# Altium PCB INVERTER_v35_BOTTOM_final[1].PcbDoc
Units mm, origin at the board's own origin, x right, y up, seen from the top; angles counter-clockwise.
Board outline 187.98 x 120.77 mm, 4 copper layers (Top Layer, Mid-Layer 1, Mid-Layer 2, Bottom Layer); 103 components, 34 nets, 286 pads, 113 vias.
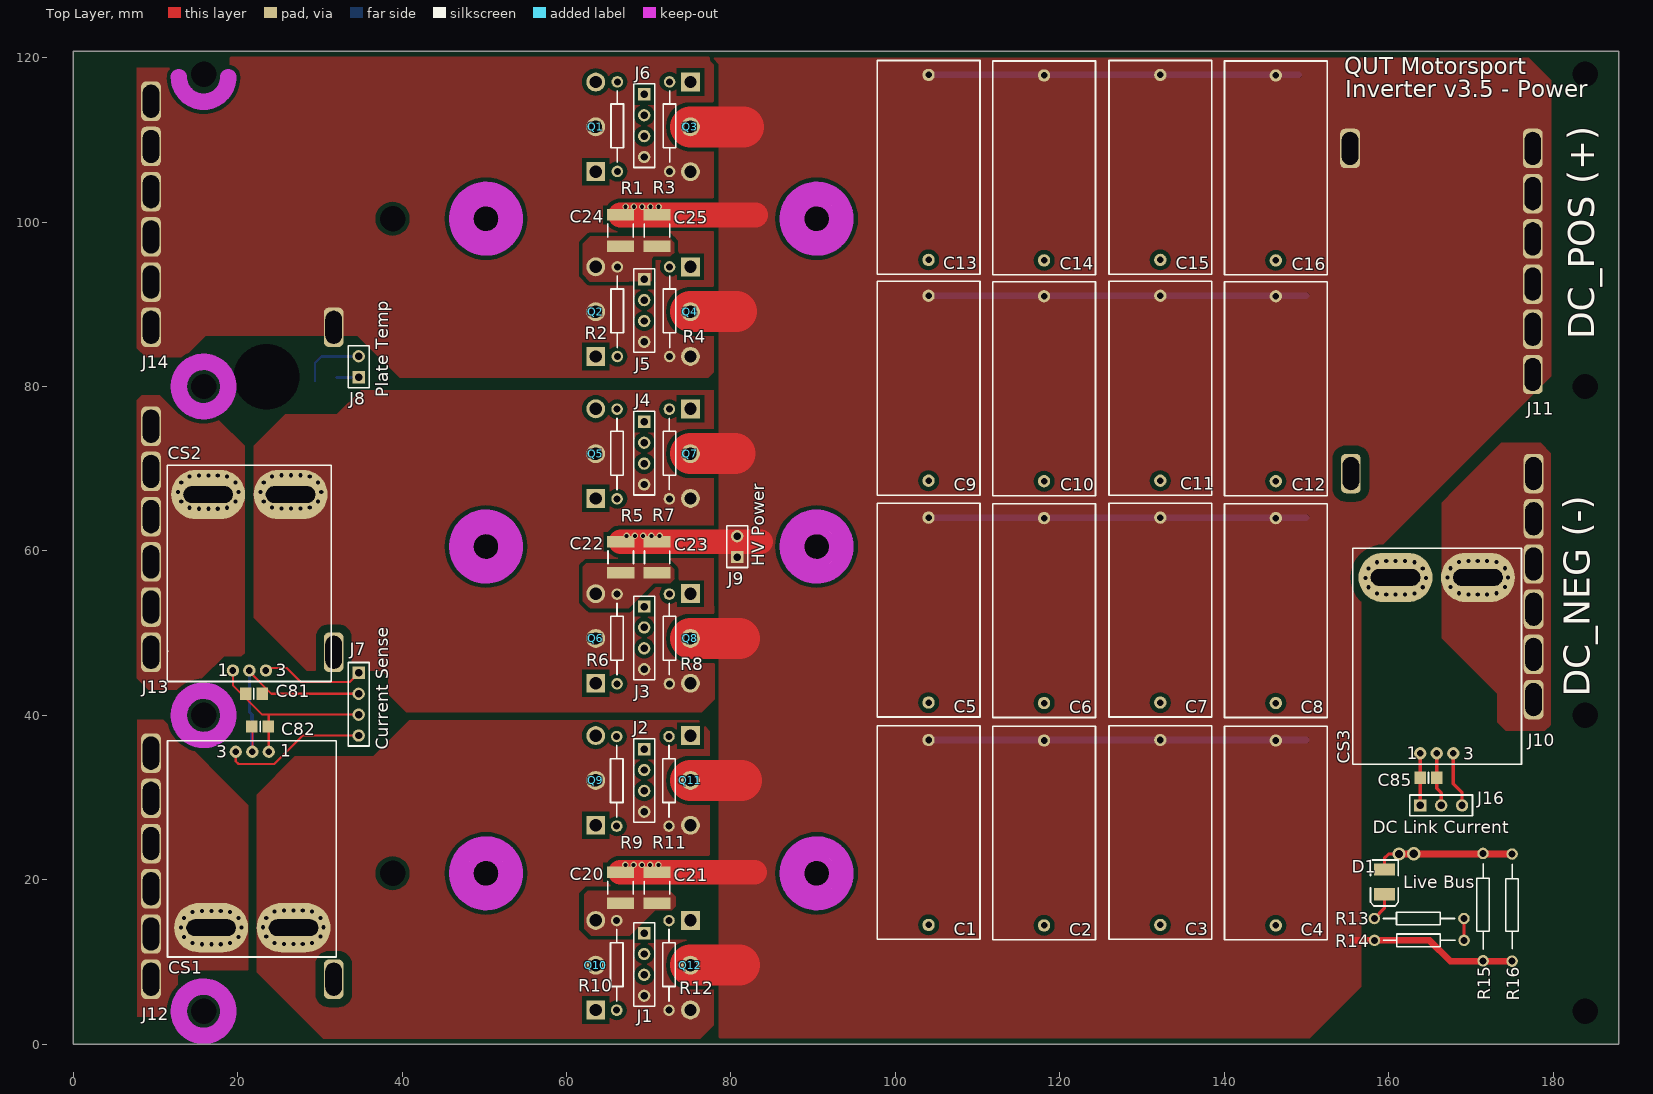
[diagram p0: Top Layer view]
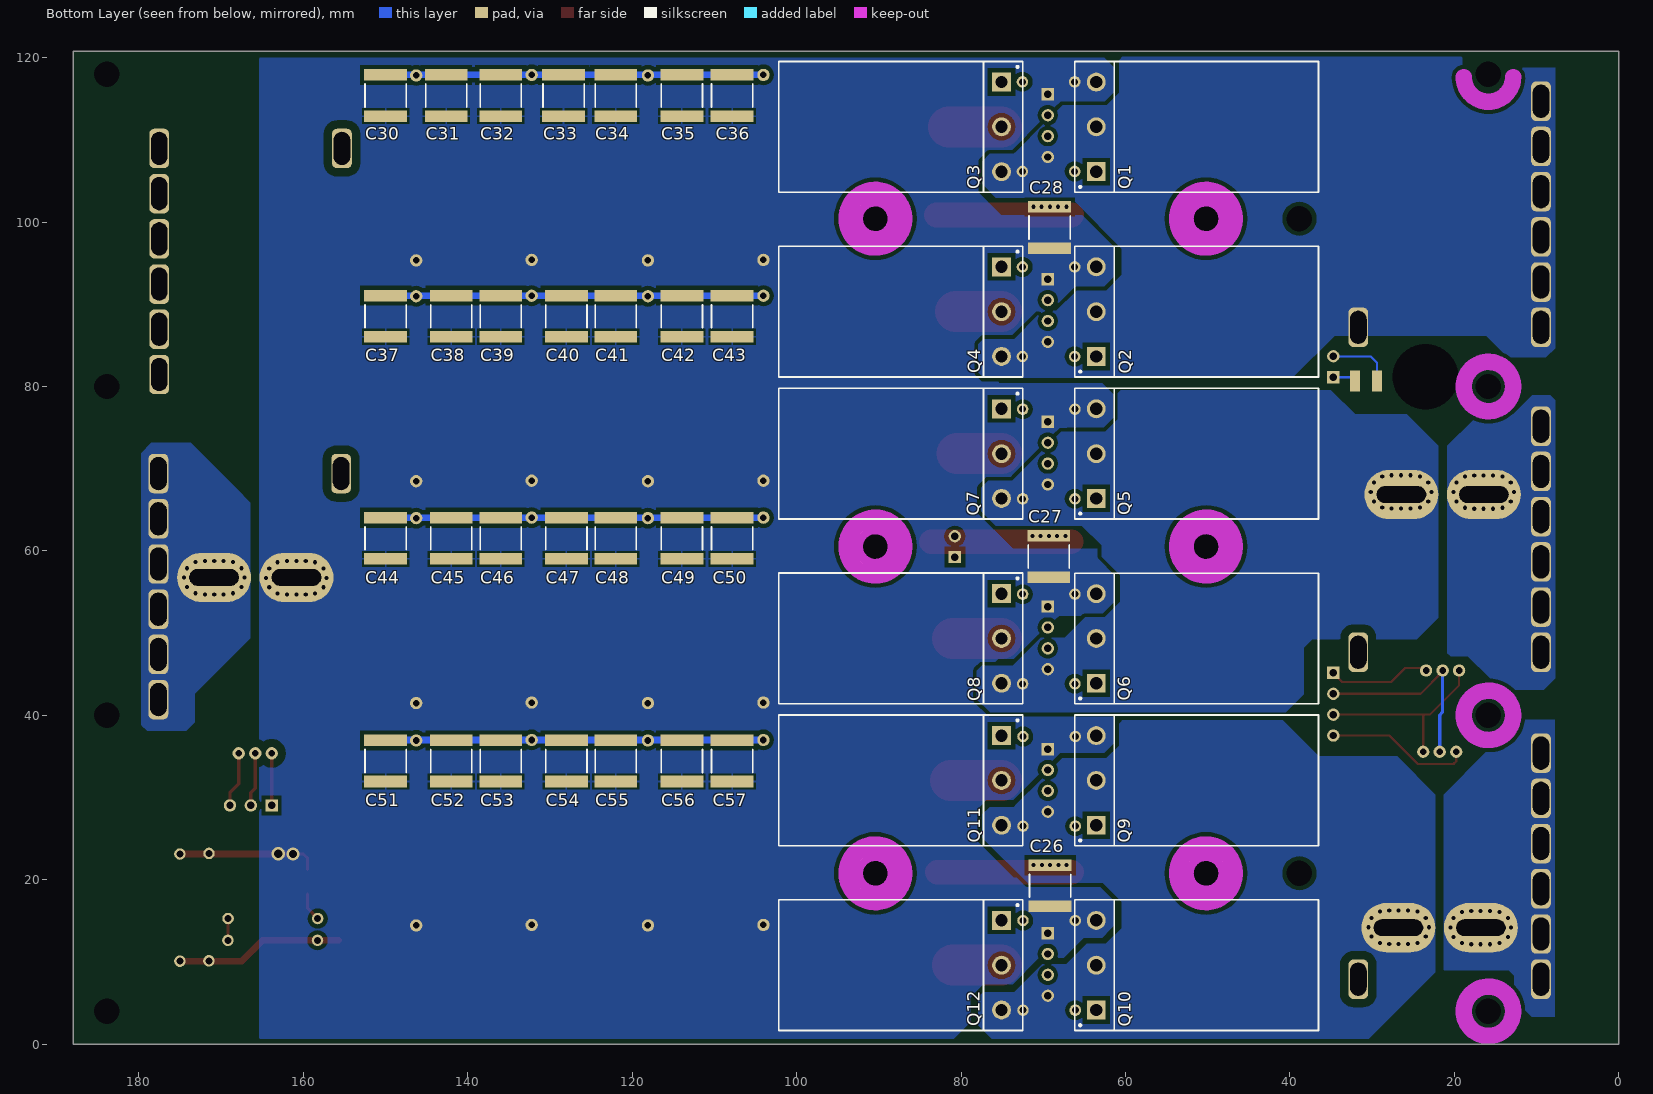
[diagram p1: Bottom Layer view, seen from below]
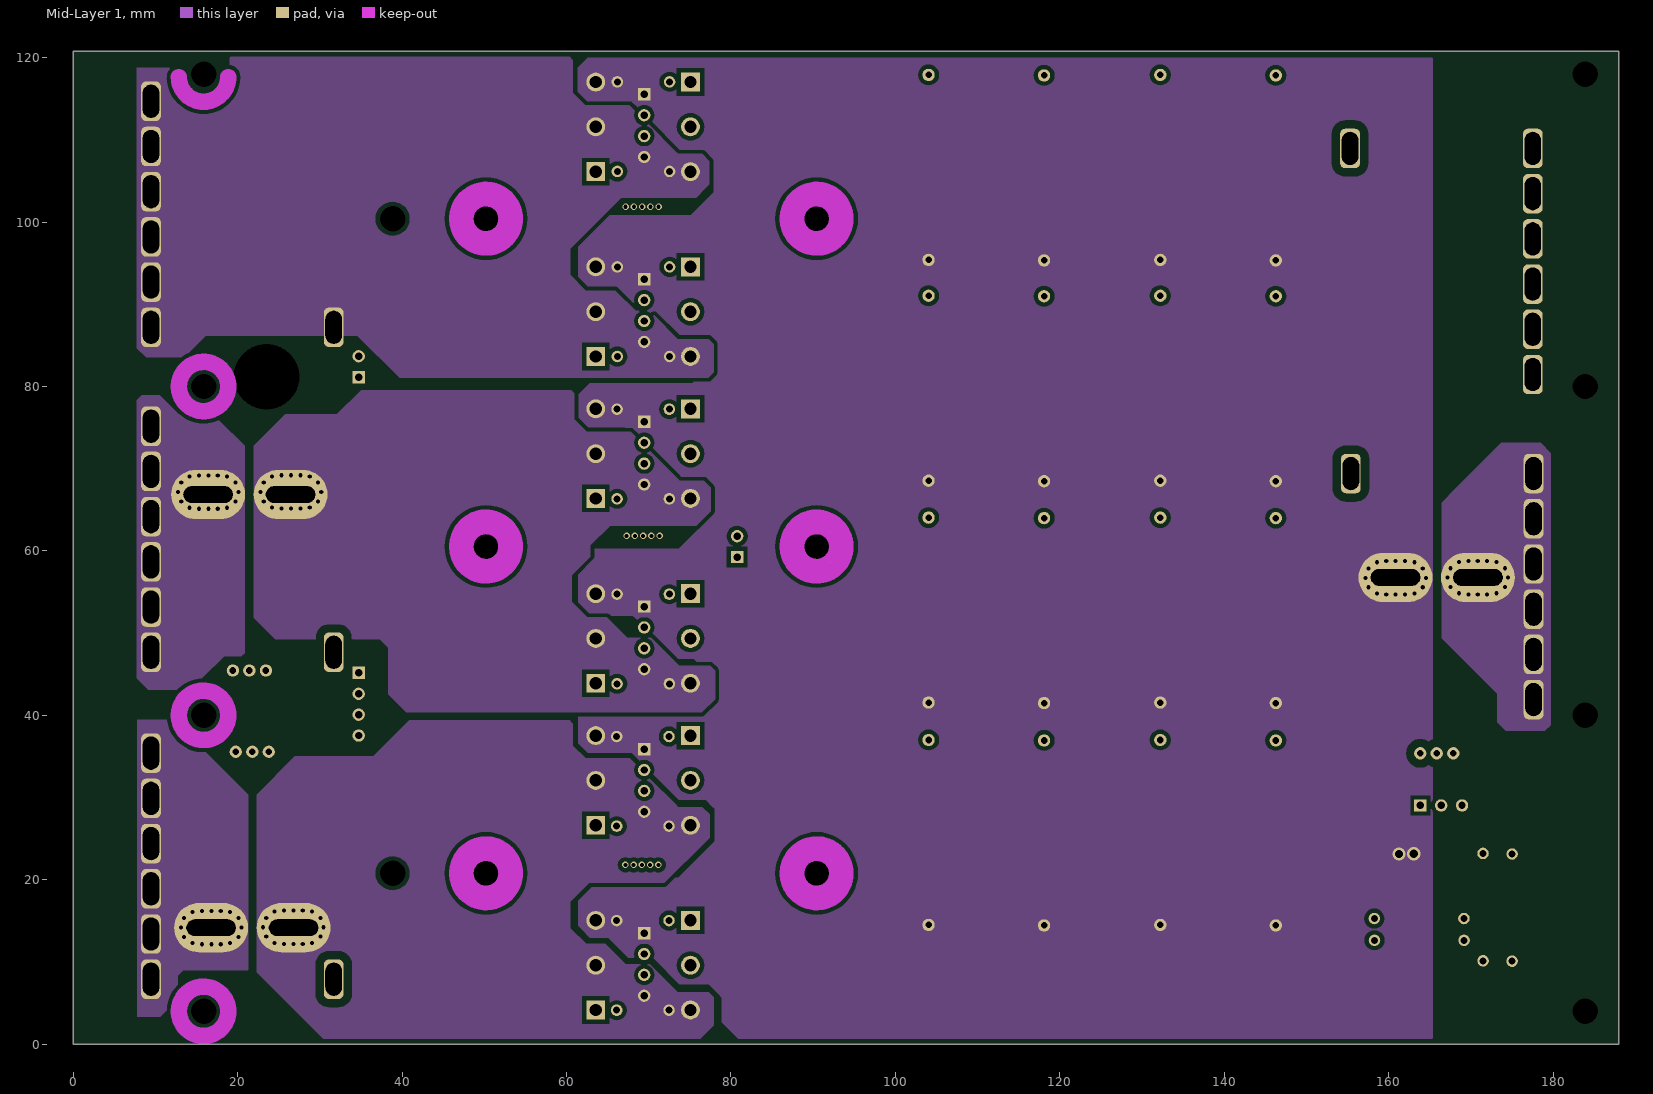
[diagram p2: Mid-Layer 1]
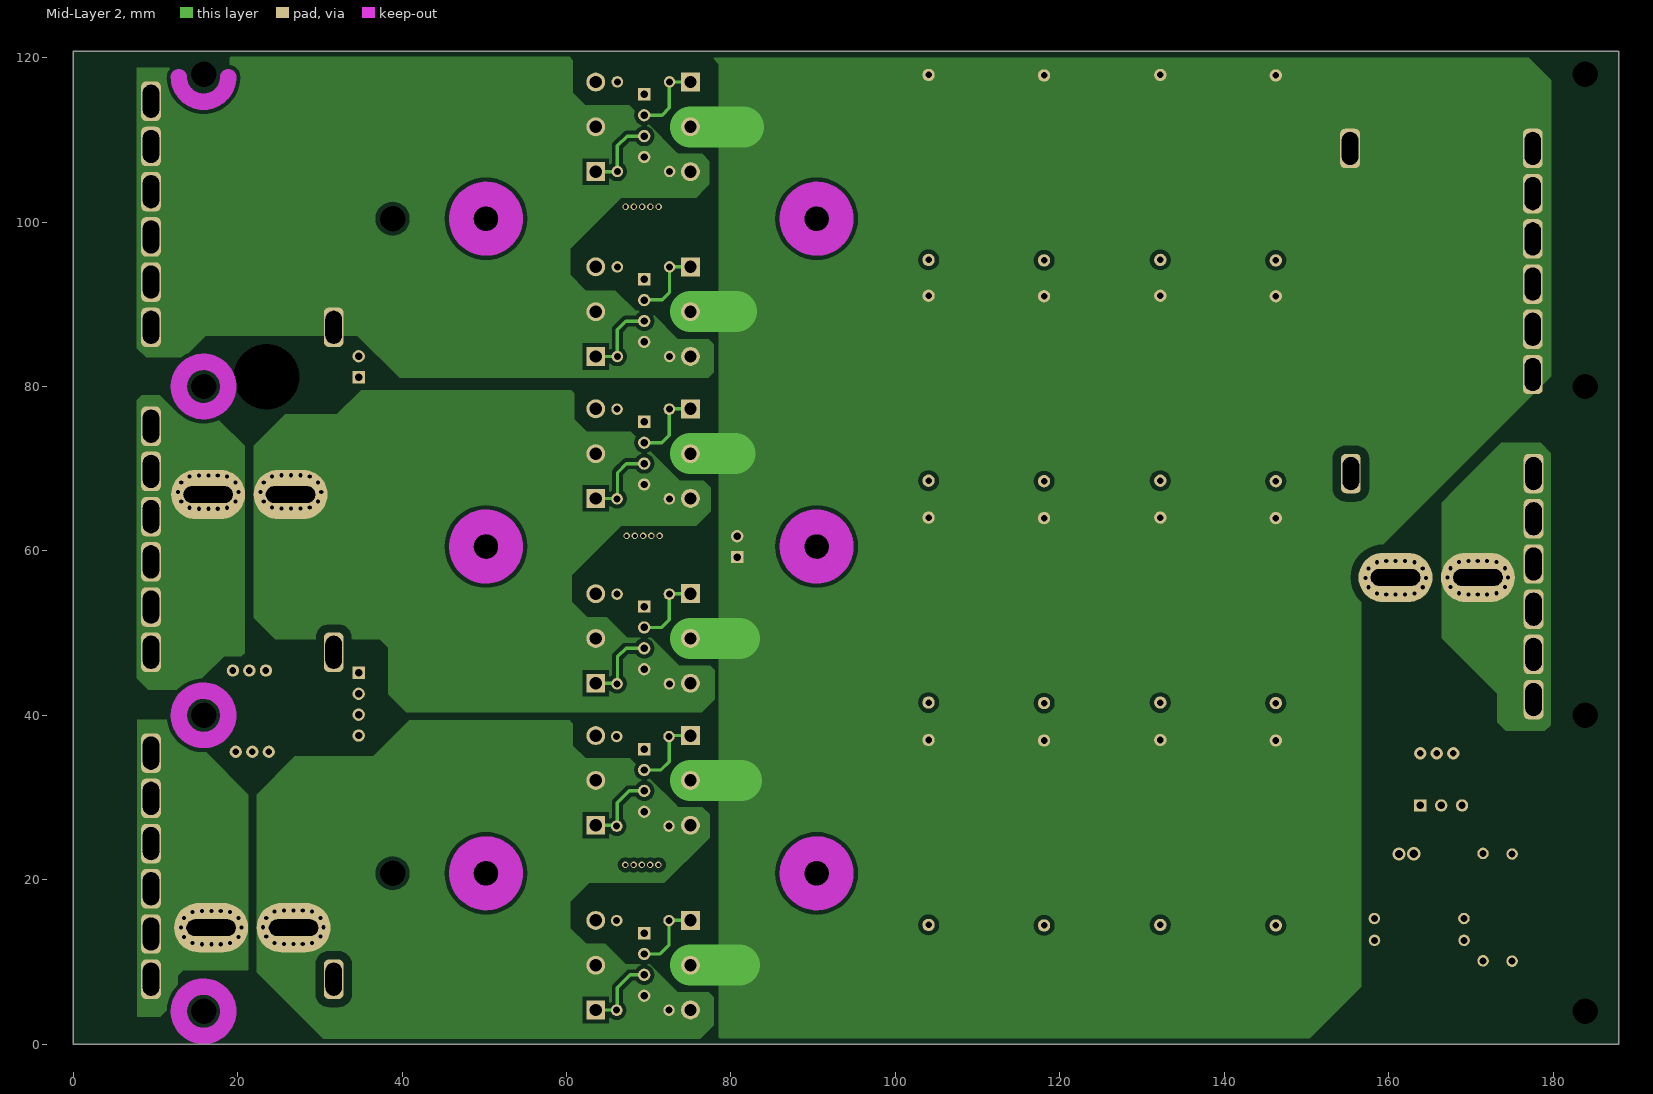
[diagram p3: Mid-Layer 2]

## Layer stack, top to bottom
Top Solder: solder mask 0.0102, Solder Resist, Dk 3.5
Top Layer: signal copper 0.07
Dielectric1: core 0.32, FR-4, Dk 4.8
Mid-Layer 1: signal copper 0.035
Dielectric2: prepreg 0.32, FR-4, Dk 4.8
Mid-Layer 2: signal copper 0.035
Dielectric3: core 0.32, FR-4, Dk 4.8
Bottom Layer: signal copper 0.07
Bottom Solder: solder mask 0.0102, Solder Resist, Dk 3.5

## Board outline
0,0 187.98,0 187.98,120.77 0,120.77

## Design rules (kind name [scope] priority, off if disabled: settings)
Clearance "Shrimp Clear" [InComponent('J10')OR InComponent('J11') OR InComponent('J12') OR InComponent('J13') OR InComponent('J15') OR InComponent('CS3')] p1: gap=1
Clearance [All] p2: gap=0.5
Height [All] p1: minheight=0 maxheight=30 prefheight=12.7
HoleSize [All] p1: absolutevalues=TRUE maxlimit=10 minlimit=0.025 maxpercent=80.000 minpercent=20.000
MinimumSolderMaskSliver [All] p1: minsoldermaskwidth=0.16
PlaneClearance [All] p1: clearance=1
PlaneConnect [All] p1: planeconnectstyle=Direct reliefexpansion=0.508 reliefentries=4 reliefconductorwidth=0.254 reliefairgap=0.254
PolygonConnect "Rear Cap Connect" [(InNet('HV_NEG') AND (InComponent('C30') OR InComponent('C31') OR InComponent('C32') OR InComponent('C33') OR InComponent('C34') OR InComponent('C35') OR InComponent('C36') OR InComponent('C37') OR InComponent('C38') OR InComponent('C39') OR InComponent('C40') OR InComponent('C41') OR InComponent('C42') OR InComponent('C43') OR InComponent('C44') OR InComponent('C45') OR InComponent('C46') OR InComponent('C47') OR InComponent('C48') OR InComponent('C49') OR InComponent('C50') OR InComponent('C51') OR InComponent('C52') OR InComponent('C53') OR InComponent('C54') OR InComponent('C55') OR InComponent('C56') OR InComponent('C57')))] p1: connectstyle=Relief reliefconductorwidth=0.254 reliefentries=4 polygonreliefangle="90 Angle" airgapwidth=0.254
PolygonConnect [All] p2: connectstyle=Direct reliefconductorwidth=0.254 reliefentries=4 polygonreliefangle="90 Angle" airgapwidth=0.254
RoutingVias [All] p1: holewidth=0.5 width=0.8 viastyle="Through Hole" minholewidth=0.5 minwidth=0.8 maxholewidth=0.5 maxwidth=0.8
SilkToSolderMaskClearance SilkscreenOverComponentPads [IsPad] p1: minsilkscreentomaskgap=0.254 clearancetoexposedcopper=TRUE
SolderMaskExpansion [IsVia] p1: expansion=-1
Width [All] p1: maxlimit=10 minlimit=0.2 preferedwidth=0.254
24 further rules are at their usual default settings.

## Components (designator, comment, footprint, x,y, rotation, side; value= is the part's Value field where it differs from the comment)
C1 "Comment" RAD-0.1 104.035,35.731 r90 top locked
C2 "Comment" RAD-0.1 118.085,35.671 r90 top locked
C3 "Comment" RAD-0.1 132.225,35.731 r90 top locked
C4 "Comment" RAD-0.1 146.275,35.671 r90 top locked
C5 "Comment" RAD-0.1 104.035,62.781 r90 top locked
C6 "Comment" RAD-0.1 118.085,62.721 r90 top locked
C7 "Comment" RAD-0.1 132.225,62.781 r90 top locked
C8 "Comment" RAD-0.1 146.275,62.721 r90 top locked
C9 "Comment" RAD-0.1 104.035,89.771 r90 top locked
C10 "Comment" RAD-0.1 118.085,89.711 r90 top locked
C11 "Comment" RAD-0.1 132.225,89.771 r90 top locked
C12 "Comment" RAD-0.1 146.275,89.711 r90 top locked
C13 "Comment" RAD-0.1 104.035,116.631 r90 top locked
C14 "Comment" RAD-0.1 118.085,116.571 r90 top locked
C15 "Comment" RAD-0.1 132.225,116.631 r90 top locked
C16 "Comment" RAD-0.1 146.275,116.571 r90 top locked
C20 "Comment" 1812 66.56,19.02 r270 top
C21 "Comment" 1812 70.99,19.02 r270 top
C22 "Comment" 1812 66.59,59.22 r270 top
C23 "Comment" 1812 71.02,59.22 r270 top
C24 "Comment" 1812 66.56,98.97 r270 top
C25 "Comment" 1812 70.99,98.97 r270 top
C26 "Comment" 2220 69.16,19.25 r270 bottom
C27 "Comment" 2220 69.33,59.32 r270 bottom
C28 "Comment" 2220 69.23,99.34 r270 bottom
C30 "Comment" 2220 150,115.4 r270 bottom
C31 "Comment" 2220 142.61,115.4 r270 bottom
C32 "Comment" 2220 136,115.4 r270 bottom
C33 "Comment" 2220 128.35,115.4 r270 bottom
C34 "Comment" 2220 122,115.4 r270 bottom
C35 "Comment" 2220 113.95,115.4 r270 bottom
C36 "Comment" 2220 107.85,115.4 r270 bottom
C37 "Comment" 2220 150,88.56 r270 bottom
C38 "Comment" 2220 142,88.56 r270 bottom
C39 "Comment" 2220 136,88.56 r270 bottom
C40 "Comment" 2220 128,88.56 r270 bottom
C41 "Comment" 2220 122,88.56 r270 bottom
C42 "Comment" 2220 113.95,88.56 r270 bottom
C43 "Comment" 2220 107.85,88.56 r270 bottom
C44 "Comment" 2220 150,61.53 r270 bottom
C45 "Comment" 2220 142,61.53 r270 bottom
C46 "Comment" 2220 136,61.53 r270 bottom
C47 "Comment" 2220 128,61.53 r270 bottom
C48 "Comment" 2220 122,61.53 r270 bottom
C49 "Comment" 2220 113.95,61.53 r270 bottom
C50 "Comment" 2220 107.85,61.53 r270 bottom
C51 "Comment" 2220 150,34.45 r270 bottom
C52 "Comment" 2220 142,34.45 r270 bottom
C53 "Comment" 2220 136,34.45 r270 bottom
C54 "Comment" 2220 128,34.45 r270 bottom
C55 "Comment" 2220 122,34.45 r270 bottom
C56 "Comment" 2220 113.95,34.45 r270 bottom
C57 "Comment" 2220 107.85,34.45 r270 bottom
C81 "Comment" 6-0805_M 21.95,42.62 r180 top
C82 "Comment" 6-0805_M 22.73,38.64 r180 top
C85 "Comment" 6-0805_M 164.85,32.41 r0 top
CS1 "Comment" T05B 33.9,12.26 r180 top
CS2 "Comment" T05B 9.28,68.76 r0 top
CS3 "Comment" T05B 153.72,58.68 r0 top
D1 "Comment" 3.5X2.8X1.9 159.49,19.75 r270 top
J1 "Comment" HDR1X4 69.44,13.51 r270 top
J2 "Comment" HDR1X4 69.44,35.89 r270 top
J3 "Comment" HDR1X4 69.44,53.23 r270 top
J4 "Comment" HDR1X4 69.44,75.7 r270 top
J5 "Comment" HDR1X4 69.44,93.05 r270 top
J6 "Comment" HDR1X4 69.44,115.54 r270 top
J7 "Comment" HDR1X4 34.71,45.16 r270 top
J8 "Comment" HDR1X2 34.71,81.14 r90 top
J9 "Comment" HDR1X2 80.75,59.25 r90 top
J10 "Comment" Shrimp44 166.52,55.66 r180 top
J11 "Comment" Shrimp44 166.42,95.21 r180 top
J12 "Comment" Shrimp44 20.56,21.65 r0 top
J13 "Comment" Shrimp44 20.56,61.42 r0 top
J14 "Comment" Shrimp44 20.56,100.95 r0 top
J16 "Comment" HDR1X3 163.85,29.04 r0 top
Q1 "Comment" TO-247 63.546,111.585 r90 top locked
Q2 "Comment" TO-247 63.546,89.105 r90 top locked
Q3 "Comment" TO-247 75.071,111.585 r270 top locked
Q4 "Comment" TO-247 75.071,89.106 r270 top locked
Q5 "Comment" TO-247 63.546,71.834 r90 top locked
Q6 "Comment" TO-247 63.546,49.354 r90 top
Q7 "Comment" TO-247 75.071,71.834 r270 top locked
Q8 "Comment" TO-247 75.071,49.355 r270 top locked
Q9 "Comment" TO-247 63.546,32.083 r90 top
Q10 "Comment" TO-247 63.546,9.603 r90 top
Q11 "Comment" TO-247 75.071,32.083 r270 top locked
Q12 "Comment" TO-247 75.071,9.604 r270 top locked
R1 "Comment" AXIAL-0.3#1 66.17,110.03 r270 top
R2 "Comment" AXIAL-0.3#1 66.17,87.52 r270 top
R3 "Comment" AXIAL-0.3#1 72.53,110.03 r270 top
R4 "Comment" AXIAL-0.3#1 72.53,87.52 r270 top
R5 "Comment" AXIAL-0.3#1 66.14,70.21 r270 top
R6 "Comment" AXIAL-0.3#1 66.14,47.71 r270 top
R7 "Comment" AXIAL-0.3#1 72.5,70.21 r270 top
R8 "Comment" AXIAL-0.3#1 72.5,47.71 r270 top
R9 "Comment" AXIAL-0.3#1 66.1,30.39 r270 top
R10 "Comment" AXIAL-0.3#1 66.1,8 r270 top
R11 "Comment" AXIAL-0.3#1 72.46,30.39 r270 top
R12 "Comment" AXIAL-0.3#1 72.46,8 r270 top
R13 "Comment" AXIAL-0.3#1 165.29,15.28 r0 top
R14 "Comment" AXIAL-0.3#1 165.31,12.63 r0 top
R15 "Comment" AXIAL-0.3#2 171.49,19.17 r90 top
R16 "Comment" AXIAL-0.3#3 175.02,19.12 r90 top

## Footprints (in the part's own frame and the unit in brackets; to place one, negate y for a bottom-side part, rotate by r counter-clockwise, add the part's x,y. Pads: shape width x height; smd on the part's side, far side on the other; paste and mask are expansions set on the pad)
3.5X2.8X1.9 [mm] "SM LED; 2 C-Bend Leads; Body 3.5 x 2.8 x 1.9 mm, inc leads (LxWxH typ)"
  rect 1.5x2.6 smd: 1(-1.5,0) 2(1.5,0)
  silkscreen extent -2.65,-1.7 2.95,1.7
6-0805_M [mm] "Chip Resistor, Body 2.0x1.2mm, IPC Low Density"
  rect 1.4x1.5 smd: 1(-1,0) 2(1,0)
  silkscreen extent 0,-0.65 0,0.65, body extent -1.07,-0.7 1.07,0.7, height 0.7
1812 [mm] "Chip Capacitor, Body 4.5x3.2mm, IPC High Density"
  rect 1.4x3.3 smd: 1(-1.9,0) 2(1.9,0)
  silkscreen extent -0.8,-1.55 0.8,1.55, body extent -2.4,-1.7 2.4,1.7, height 1.4
2220 [mm] "Chip Capacitor, Body 5.7x5.0mm, IPC High Density"
  rect 1.4x5.2 smd: 1(-2.5,0) 2(2.5,0)
  silkscreen extent -1.4,-2.5 1.4,2.5, body extent -2.95,-2.63 2.95,2.63, height 1.4
AXIAL-0.3#1 [mm] "Axial Device, Thru-Hole; 2 Leads; 0.3 in Pin Spacing"
  round 1.4 hole 0.85: 1(-7.03,0) 2(3.87,0)
  silkscreen extent -5.94,-0.76 2.77,0.76
AXIAL-0.3#2 [mm] "Axial Device, Thru-Hole; 2 Leads; 0.3 in Pin Spacing"
  round 1.4 hole 0.85: 1(-9.03,0) 2(4.03,0.01)
  silkscreen extent -7.61,-0.76 2.77,0.76
AXIAL-0.3#3 [mm] "Axial Device, Thru-Hole; 2 Leads; 0.3 in Pin Spacing"
  round 1.4 hole 0.85: 1(-9.03,0) 2(4.01,0)
  silkscreen extent -7.49,-0.76 2.77,0.76
HDR1X2 [mm] "Connector; Header; 2 Position"
  rect 1.5x1.5 hole 0.9: 1(0,0)
  round 1.5 hole 0.9: 2(2.54,0)
  silkscreen extent -1.27,-1.27 3.81,1.27
HDR1X3 [mm] "Connector; Header; 3 Position"
  rect 1.5x1.5 hole 0.9: 1(0,0)
  round 1.5 hole 0.9: 2(2.54,0) 3(5.08,0)
  silkscreen extent -1.27,-1.27 6.35,1.27
HDR1X4 [mm] "Connector; Header; 4 Position"
  rect 1.5x1.5 hole 0.9: 1(0,0)
  round 1.5 hole 0.9: 2(2.54,0) 3(5.08,0) 4(7.62,0)
  silkscreen extent -1.27,-1.27 8.89,1.27
RAD-0.1 [mm] "Radial Cap, Thru-Hole; 2 Leads; 0.1 in Pin Spacing"
  round 1.5 hole 0.8: 1(-21.23,0) 2(1.27,0)
  silkscreen extent -22.98,-6.25 3.02,6.25
Shrimp44 [mm]
  rrect50% 2.4x4.8 hole 2 slot 4 at 90 deg: 1(-11.112,13.75) 2(-11.112,8.25) 3(-11.112,2.75) 4(-11.112,-2.75) 5(-11.112,-8.25) 6(-11.112,-13.75) 7(11.113,-13.75)
T05B [mm] "TO, Thru-Hole, Vertical, Heatsink Mounted; 5 Bent Staggered Leads; Pitch 1.7 mm"
  round 1.5 hole 0.8: 1(10.128,-23.305) 3(12.129,-23.305) 5(14.145,-23.305)
  oval 9x6 hole 2 slot 6 at 0 deg: 4(7.112,-1.905) 5(17.145,-1.905)
  silkscreen extent 1.92,-24.65 22.44,1.65
TO-247 [mm] "SIP with Mounting Hole; 3 Leads; Body 20 x 15.6 x 5 mm (typ); Pitch 5.45 mm"
  rect 2.3x2.3 hole 1.5: 1(-5.45,0)
  round 2.3 hole 1.5: 2(0,0) 3(5.45,0)
  body extent -7.95,4.72 7.95,26.27

## Part data
C20 C21 C22 C23 C24 C25 C26 C27 C28 C30 C31 C32 C33 C34 C35 C36 C37 C38 C39 C40 C41 C42 C43 C44 C45 C46 C47 C48 C49 C50 C51 C52 C53 C54 C55 C56 C57: library part "Cap Pol3"
D1: library part LED3
J1 J2 J3 J4 J5 J6 J7: library part "Header 4"
J8 J9: library part "Header 2"
J10 J11 J12 J13 J14: library part Shrimp44
J16: library part "Header 3"
R1 R2 R3 R4 R5 R6 R7 R8 R9 R10 R11 R12 R13 R14 R15 R16: library part Res1

## Free pads (board coordinates)
  rect 1.2x2.5 smd far side: 2(32.09,80.67) 3(29.39,80.67)
  round 1.524 hole 3.1: ""(15.84,4) ""(15.84,40) ""(15.84,80) ""(15.84,118) ""(38.83,20.78) ""(38.83,100.409) ""(183.91,4) ""(183.91,40) ""(183.91,80) ""(183.91,118)
  round 1.524 hole 8: ""(23.51,81.19)
  round 5 hole 5 unplated: ""(50.195,20.78) ""(50.195,60.531) ""(50.195,100.409) ""(90.422,20.653) ""(90.422,60.404) ""(90.422,100.282)

## Via types
v1: diameter 0.8, hole 0.5, Top Layer to Bottom Layer, 111 vias
v2: diameter 1.6, hole 1, Top Layer to Bottom Layer, 2 vias

## Nets (pads, with @x,y where several pads share a name; then routed paths per layer and width w, separated by ;. In a path a pad name is that pad's centre, name@x,y a point inside that pad or via, vN(x,y) a via of type N, cw(c..) or ccw(c..) an arc to the next point about the centre after c; other vN are vias at no path point)
gate_U_HI_A: J6.2 Q3.1 R3.1 | length 9.2
  Mid-Layer 2 w0.4: J6.2 71.61,113 72.5,113.89 72.5,117.04 72.495,117.035 Q3.1
gate_U_HI_B: J5.2 Q4.1 R4.1 | length 9.1
  Mid-Layer 2 w0.4: J5.2@69.44,90.562 71.642,90.562 72.51,91.43 72.51,94.54 72.526,94.556 Q4.1
gate_U_LO_A: J6.3 Q1.1 R1.2 | length 10
  Mid-Layer 2 w0.4: Q1.1 66.315,106.135 66.18,106 66.18,109.27 67.37,110.46 J6.3
gate_U_LO_B: J5.3 Q2.1 R2.2 | length 9.7
  Mid-Layer 2 w0.4: Q2.1 66.205,83.655 66.17,83.62 66.17,86.9 67.22,87.95 J5.3@69.44,87.95
gate_V_HI_A: J4.2 Q7.1 R7.1 | length 9.2
  Mid-Layer 2 w0.4: J4.2 71.56,73.16 72.48,74.08 72.48,77.18 72.584,77.284 Q7.1
gate_V_HI_B: J3.2 Q8.1 R8.1 | length 9.7
  Mid-Layer 2 w0.4: J3.2 71.58,50.69 72.49,51.6 72.49,54.96 72.335,54.805 Q8.1
gate_V_LO_A: J4.3 Q5.1 R5.2 | length 9.4
  Mid-Layer 2 w0.4: Q5.1 65.974,66.384 66.2,66.61 66.2,69.54 67.28,70.62 J4.3
gate_V_LO_B: J3.3 Q6.1 R6.2 | length 10.9
  Mid-Layer 2 w0.4: Q6.1 66.594,43.904 66.19,43.5 66.19,47.11 67.23,48.15 J3.3
gate_W_HI_A: J2.2 Q11.1 R11.1 | length 9.2
  Mid-Layer 2 w0.4: J2.2 71.48,33.35 72.48,34.35 72.48,37.47 72.543,37.533 Q11.1
gate_W_HI_B: J1.2 Q12.1 R12.1 | length 9
  Mid-Layer 2 w0.4: J1.2 71.37,10.97 72.47,12.07 72.47,14.97 72.554,15.054 Q12.1
gate_W_LO_A: J2.3 Q9.1 R9.2 | length 9.2
  Mid-Layer 2 w0.4: Q9.1 66.173,26.633 66.17,26.63 66.17,29.37 67.61,30.81 J2.3
gate_W_LO_B: J1.3 Q10.1 R10.2 | length 9.2
  Mid-Layer 2 w0.4: Q10.1 R10.2@66.077,4.153 ; R10.2 66.11,4.13 66.17,4.19 66.17,6.87 67.73,8.43 J1.3
HV_NEG: C1.1 C2.1 C3.1 C4.1 C5.1 C6.1 C7.1 C8.1 C9.1 C10.1 C11.1 C12.1 C13.1 C14.1 C15.1 C16.1 C20.2 C21.2 C22.2 C23.2 C24.2 C25.2 C26.2 C27.2 C28.2 C30.2 C31.2 C32.2 C33.2 C34.2 C35.2 C36.2 C37.2 C38.2 C39.2 C40.2 C41.2 C42.2 C43.2 C44.2 C45.2 C46.2 C47.2 C48.2 C49.2 C50.2 C51.2 C52.2 C53.2 C54.2 C55.2 C56.2 C57.2 CS3.4 D1.1 J1.1 J2.1 J3.1 J4.1 J5.1 J6.1 Q1.3 Q2.3 Q5.3 Q6.3 Q9.3 Q10.3 R1.1 R2.1 R5.1 R6.1 R9.1 R10.1 R15.2 R16.2 | length 18.9
  Top Layer w0.4: D1.1 159.49,22.62 160,23.13 163.06,23.13 v2@163.05,23.14
  Top Layer w0.8: v2(161.26,23.13) R16.2
  other v1: 159.71,54.69 160.853,54.69 161.996,54.69 158.567,54.817 163.139,54.817 157.551,55.579 164.155,55.579 157.17,56.722 164.536,56.722 157.551,57.865 164.155,57.865 158.567,58.627 163.139,58.627 159.71,58.754 160.853,58.754 161.996,58.754
  other v2: 163.05,23.16
HV_POS: C1.2 C2.2 C3.2 C4.2 C5.2 C6.2 C7.2 C8.2 C9.2 C10.2 C11.2 C12.2 C13.2 C14.2 C15.2 C16.2 C20.1 C21.1 C22.1 C23.1 C24.1 C25.1 C26.1 C27.1 C28.1 C30.1 C31.1 C32.1 C33.1 C34.1 C35.1 C36.1 C37.1 C38.1 C39.1 C40.1 C41.1 C42.1 C43.1 C44.1 C45.1 C46.1 C47.1 C48.1 C49.1 C50.1 C51.1 C52.1 C53.1 C54.1 C55.1 C56.1 C57.1 J9.1 J9.2 J11.1 J11.2 J11.3 J11.4 J11.5 J11.6 J11.7 Q3.2 Q4.2 Q7.2 Q8.2 Q11.2 Q12.2 R14.1 R15.1 R16.1 | length 324.1
  Top Layer w0.8: 155.69,12.62 164.98,12.62 167.51,10.09 R16.1
  Top Layer w3: C20.1 82.85,20.92 ; C24.1 82.98,100.87 ; C22.1 83.63,61.12
  Top Layer w5: Q12.2 81.006,9.604 ; Q11.2 81.277,32.083 ; Q8.2 81.045,49.355 ; Q7.2 80.464,71.834 ; Q4.2 80.686,89.106 ; Q3.2 81.495,111.585
  Mid-Layer 2 w5: Q12.2 81.006,9.604 ; Q11.2 81.277,32.083 ; Q8.2 81.045,49.355 ; Q7.2 80.464,71.834 ; Q4.2 80.686,89.106 ; Q3.2 81.495,111.585
  Bottom Layer w0.8: C1.2 C51.1@149.949,37.001 ; C5.2 C44.1@149.979,64.051 ; C9.2 C37.1@149.981,91.041 ; C13.2 C30.1@149.06,117.9
  other v1: 67.16,21.81 68.16,21.81 69.16,21.81 70.16,21.81 71.16,21.81 67.31,61.82 68.31,61.82 69.31,61.82 70.31,61.82 71.31,61.82 67.19,101.86 68.19,101.86 69.19,101.86 70.19,101.86 71.19,101.86
HV_SHUNT: CS3.5@170.865,56.775 J10.1 J10.2 J10.3 J10.4 J10.5 J10.6
  other v1: 169.693,54.72 170.836,54.72 171.979,54.72 168.55,54.847 173.122,54.847 167.534,55.609 174.138,55.609 167.153,56.752 174.519,56.752 167.534,57.895 174.138,57.895 168.55,58.657 173.122,58.657 169.693,58.784 170.836,58.784 171.979,58.784
ph_U: J5.4 J6.4 J14.1 J14.2 J14.3 J14.4 J14.5 J14.6 J14.7 Q1.2 Q2.2 Q3.3 Q4.3 R3.2 R4.2
ph_V: CS2.5@26.425,66.855 J3.4 J4.4 Q5.2 Q6.2 Q7.3 Q8.3 R7.2 R8.2
  other v1: 25.324,65.136 26.467,65.136 27.61,65.136 24.181,65.263 28.753,65.263 23.165,66.025 29.769,66.025 22.784,67.168 30.15,67.168 23.165,68.311 29.769,68.311 24.181,69.073 28.753,69.073 25.324,69.2 26.467,69.2 27.61,69.2
ph_V_shunt: CS2.4 J13.1 J13.2 J13.3 J13.4 J13.5 J13.6
  other v1: 15.281,65.126 16.424,65.126 17.567,65.126 14.138,65.253 18.71,65.253 13.122,66.015 19.726,66.015 12.741,67.158 20.107,67.158 13.122,68.301 19.726,68.301 14.138,69.063 18.71,69.063 15.281,69.19 16.424,69.19 17.567,69.19
ph_W: CS1.4 J1.4 J2.4 Q9.2 Q10.2 Q11.3 Q12.3 R11.2 R12.2
  other v1: 25.624,12.186 26.767,12.186 27.91,12.186 24.481,12.313 29.053,12.313 23.465,13.075 30.069,13.075 23.084,14.218 30.45,14.218 23.465,15.361 30.069,15.361 24.481,16.123 29.053,16.123 25.624,16.25 26.767,16.25 27.91,16.25
ph_W_shunt: CS1.5@16.755,14.165 J12.1 J12.2 J12.3 J12.4 J12.5 J12.6
  other v1: 15.641,12.156 16.784,12.156 17.927,12.156 14.498,12.283 19.07,12.283 13.482,13.045 20.086,13.045 13.101,14.188 20.467,14.188 13.482,15.331 20.086,15.331 14.498,16.093 19.07,16.093 15.641,16.22 16.784,16.22 17.927,16.22
retainer: pad.@38.83,20.78
shunt_+5V: C81.2 C82.1 CS1.1 CS2.1 J7.3 | length 23.4
  Top Layer w0.254: CS2.1@19.438,45.755 19.438,43.612 22.97,40.08 J7.3 ; CS1.1 23.772,40.06
shunt_b_5v: C85.1 CS3.1 J16.1 | length 6.3
  Top Layer w0.4: J16.1@163.848,29.042 CS3.1
shunt_b_gnd: C85.2 CS3.3 J16.2 | length 6.6
  Top Layer w0.4: CS3.3 165.848,31.102 166.39,30.56 J16.2
shunt_b_sig: CS3.5@167.865,35.375 J16.3 | length 6.8
  Top Layer w0.4: CS3.5@167.865,35.375 167.865,31.675 168.93,30.61 J16.3
shunt_gnd: C81.1 C82.2 CS1.3 CS2.3 J7.2 | length 28.2
  Top Layer w0.254: CS2.3@21.439,45.755 21.439,45.271 24.09,42.62 J7.2 ; CS1.3 C82.2@21.772,38.598
  Bottom Layer w0.4: CS2.3@21.439,45.755 21.439,40.362 21.772,40.029 CS1.3
shunt_series_V: 
shunt_series_W: 
shunt_sig_V: CS2.5@23.425,45.455 J7.1 | length 12.4
  Top Layer w0.254: CS2.5@23.455,45.755 25.945,45.755 27.64,44.06 33.61,44.06 J7.1
shunt_sig_W: CS1.5@19.755,35.565 J7.4 | length 17.7
  Top Layer w0.254: CS1.5@19.755,35.565 19.755,34.415 20.09,34.08 24.46,34.08 27.92,37.54 J7.4
temp_a: J8.2 pad.3 | length 7.9
  Bottom Layer w0.254: pad.3 29.39,82.87 30.19,83.67 J8.2@34.71,83.67
temp_b: J8.1 pad.2 | length 2.7
  Bottom Layer w0.254: pad.2@32.02,81.13 J8.1@34.71,81.13
temp_gnd: 
temp_sig: 
pads on no net: D1.2 J10.7 J12.7 J13.7 R13.1 R13.2 R14.2
copper on no net: | length 6.1
  Top Layer w0.4: 158.26,15.28 159.49,16.51 159.49,18.25 ; 169.16,12.67 169.16,15.28

## Polygon pours and split planes (outlines as drawn)
HV_SHUNT on Top Layer "Top Layer-No Net 1" (solid, pour order 33): 173.7,73.13 168.125,67.555 166.45,65.88 166.45,49.38 172.04,43.79 173.21,42.62 173.21,40.06 173.21,39.17 174.01,38.37 174.24,38.14 176.89,38.14 179.02,38.14 179.63,38.75 179.73,38.85 179.73,39.9 179.73,71.89 178.49,73.13 178.18,73.13
HV_POS on Top Layer "Top Layer-No Net 1" (solid, pour order 29): 78.52,119.23 78.52,0.72 150.41,0.72 156.65,6.96 156.65,24.58 156.65,58.12 179.77,81.24 179.77,117.27 177.06,119.98 146.72,119.98 77.77,119.98 77.7,120.05
HV_NEG on Top Layer "Top Layer-No Net 1" (solid, pour order 32): 62.12,18.25 62.12,14.06 62.83,13.35 62.99,13.19 67.71,13.19 67.71,13.21 70.5,16 70.77,16.27 72.71,16.27 72.78,16.27 73.29,16.78 73.26,16.81 73.26,17.59 73.26,17.94 72.83,18.37 72.51,18.69 62.76,18.69 62.56,18.69 62.12,18.25
ph_W on Top Layer "Top Layer-No Net 1" (solid, pour order 44): 76.29,0.66 77.9,2.27 77.9,12.7 70.9,12.7 64.23,12.7 62.7,12.7 61.49,13.91 61.49,18.35 62.32,19.18 75.41,19.18 77.39,21.16 77.39,27.2 77.39,27.96 77.39,28.46 77.39,29.32 77.39,34.38 77.39,38.092 76.1,39.382 68.369,39.381 65.21,39.38 59.92,39.38 60.13,39.38 60.27,39.38 60.33,39.38 60.35,39.38 60.38,39.38 40.85,39.38 36.49,35.02 26.96,35.02 22.29,30.35 22.29,8.77 30.41,0.65 34.27,0.65 36.68,0.65 37.87,0.65 38.52,0.65 39.78,0.65 40.74,0.65 76.28,0.65
HV_NEG on Top Layer "Top Layer-No Net 1" (solid, pour order 31): 61.98,58.07 61.98,53.88 62.69,53.17 62.85,53.01 67.57,53.01 67.57,53.03 70.36,55.82 70.63,56.09 72.57,56.09 72.64,56.09 73.15,56.6 73.12,56.63 73.12,57.41 73.12,57.76 72.69,58.19 72.37,58.51 62.62,58.51 62.42,58.51 61.98,58.07
HV_NEG on Top Layer "Top Layer-No Net 1" (solid, pour order 30): 61.96,97.35 61.96,93.63 62.67,92.92 62.83,92.76 67.55,92.76 67.55,92.78 70.34,92.76 70.34,95.57 70.61,95.84 72.55,95.84 72.62,95.84 73.13,96.35 73.1,96.38 73.1,97.16 73.1,97.51 72.67,97.94 72.35,98.26 62.87,98.26
ph_V on Top Layer "Top Layer-No Net 1" (solid, pour order 43): 76.45,40.37 78.06,41.98 78.06,45.41 78.04,45.43 78.06,46.47 78.04,47.65 78.06,49.03 77.929,54.201 77.929,59.42 77.929,62.75 77.929,63.82 77.929,67.81 77.929,73.96 77.929,79.565 63.49,79.565 60.565,79.565 60.08,79.565 58.66,79.565 35.035,79.565 32.07,76.6 25.76,76.6 21.94,72.78 21.94,51.886 24.582,49.244 28.418,45.408 36.33,45.408 37.592,45.408 38.3,44.7 38.3,42.55 40,40.85 40.49,40.36 40.9,40.36 76.44,40.36
ph_U on Top Layer "Top Layer-No Net 1" (solid, pour order 39): 77.24,81.07 77.88,81.73 77.88,85.16 77.88,86.14 77.88,87.23 77.88,90.77 77.88,94.23 77.88,96.27 77.88,98.84 77.88,101.15 77.88,107.02 77.88,108.42 77.88,115.99 77.88,120.099 60.36,120.09 59.8,120.09 27.86,120.09 27.54,120.09 27.3,120.09 26.75,120.09 26.3,120.09 19.03,120.092 19.03,117.68 17.9,115.76 14.98,115.29 12.06,118.75 7.74,118.75 7.74,84.67 8.86,83.55 13.45,83.55 16.085,86.185 34.565,86.185 39.68,81.07 42.66,81.07 61.01,81.07
ph_V_shunt on Top Layer "Top Layer-No Net 1" (solid, pour order 54): 7.74,44.5 9.11,43.13 14.28,43.13 18.335,47.185 20.44,47.185 20.82,47.565 20.82,59.97 20.82,72.78 17,76.6 12.84,76.6 10.525,78.915 10.09,78.915 9.715,78.915 9.11,78.915 8.335,78.915 7.74,78.32
ph_W_shunt on Top Layer "Top Layer-No Net 1" (solid, pour order 53): 7.75,3.33 10.55,3.33 12.715,5.495 12.715,8.295 13.38,8.96 21.3,8.96 21.3,29.082 18.191,32.191 12.046,38.336 10.946,39.436 9.13,39.436 7.75,39.436
HV_SHUNT on Bottom Layer "Top Layer-No Net 1" (solid, pour order 33): 173.7,73.13 168.125,67.555 166.45,65.88 166.45,49.38 172.04,43.79 173.21,42.62 173.21,40.06 173.21,39.17 174.01,38.37 174.24,38.14 176.89,38.14 179.02,38.14 179.63,38.75 179.73,38.85 179.73,39.9 179.73,71.89 178.49,73.13 178.18,73.13
ph_V on Bottom Layer "Top Layer-No Net 1" (solid, pour order 42): 76.45,40.37 78.06,41.98 78.06,45.41 78.04,45.43 77.45,46.02 77.42,46.02 73.71,46.02 70.29,49.44 67.36,49.44 64.89,51.91 62.53,51.91 60.62,53.82 60.62,54.04 60.62,57.03 62.909,59.319 62.909,60.674 65.29,63.056 75.766,63.056 77.55,64.84 77.55,66.91 77.55,67.67 76.9,68.32 76.68,68.54 75.43,68.54 73.76,68.54 73.35,68.95 67.83,74.47 64.7,74.47 62.48,74.47 60.94,76.01 60.94,77.93 60.94,78.23 60.94,79.19 60.565,79.565 60.08,79.565 58.66,79.565 35.035,79.565 32.07,76.6 25.76,76.6 21.94,72.78 21.94,51.886 24.582,49.244 34.174,49.244 35.35,49.244 37.254,49.244 37.859,48.639 38.3,48.197 38.3,42.55 40,40.85 40.49,40.36 40.9,40.36 76.44,40.36
ph_U on Bottom Layer "Top Layer-No Net 1" (solid, pour order 38): 77.24,81.07 77.88,81.73 77.88,85.16 77.86,85.18 77.27,85.77 77.24,85.77 73.53,85.77 70.11,89.19 68.39,89.19 65.92,91.66 62.35,91.66 60.44,93.57 60.44,93.79 60.44,96.78 66.63,102.97 75.75,102.97 76.88,104.1 77.37,104.59 77.37,106.66 77.37,107.42 76.72,108.07 76.5,108.29 75.25,108.29 73.58,108.29 73.17,108.7 67.65,114.22 64.52,114.22 62.3,114.22 60.76,115.76 60.76,117.68 60.76,117.98 60.76,119.69 60.68,119.77 60.36,120.09 59.8,120.09 27.86,120.09 27.54,120.09 27.3,120.09 26.75,120.09 26.3,120.09 19.03,120.092 19.03,117.68 17.9,115.76 14.98,115.29 12.06,118.75 7.74,118.75 7.74,84.67 8.86,83.55 13.45,83.55 16.085,86.185 34.565,86.185 39.68,81.07 42.66,81.07 61.01,81.07
HV_NEG on Bottom Layer "Top Layer-No Net 1" (solid, pour order 46): 73.73,7.29 70.51,10.51 67.5,10.51 66.43,11.58 65.05,12.96 63.45,12.96 62.83,12.96 61.84,13.95 61.39,14.4 61.41,17.47 61.53,17.59 63.08,19.14 64.8,19.14 67.27,21.61 64.8,19.14 65.89,20.23 73.57,20.23 78.01,24.67 78.01,28.43 78.01,28.62 77.75,28.88 76.91,29.72 73.81,29.72 73.66,29.72 73.47,29.91 67.95,35.43 67.52,35.43 62.58,35.43 61.53,36.48 61.39,36.62 61.39,40.17 61.39,40.24 61.56,40.41 62.91,41.76 75.99,41.76 76.22,41.76 76.47,42.01 77.03,42.57 77.03,42.84 77.03,45.31 76.62,45.72 75.47,46.87 74.87,46.87 73.31,46.87 72.97,47.21 68.07,52.11 67.43,52.11 62.9,52.11 61.55,53.46 61.39,53.62 61.39,57.49 61.39,59.02 61.66,59.29 62.66,60.29 73.66,60.29 74.45,61.08 77.11,63.74 77.11,67.69 77.11,67.88 76.92,68.07 76.23,68.76 73.47,68.76 73.35,68.76 73.16,68.95 67.08,75.03 62.15,75.03 62.06,75.03 61.85,75.24 61.41,75.68 61.41,78.88 61.41,79.01 61.61,79.21 62.79,80.39 63.25,80.39 75.32,80.39 76.51,81.58 77.46,82.53 77.46,83.12 77.46,84.65 76.86,85.25 75.86,86.25 74.96,86.25 72.04,86.25 71.16,87.13 66.29,92 64.95,92 62.7,92 62.17,92.53 61.4,93.3 61.39,97.19 65.05,100.85 61.41,97.34 64.58,100.85 75.12,100.85 77.19,102.92 77.89,103.62 77.89,103.88 77.89,106.31 75.68,108.52 75.56,108.64 75.19,108.64 72.69,108.64 67.61,113.72 67.45,113.88 67.14,113.88 63.08,113.88 61.95,115.01 61.37,115.59 61.37,118.47 61.37,118.79 61.67,119.09 62.56,119.98 67.71,119.98 165.39,119.98 165.39,62.14 165.39,4.3 165.39,0.67 161.76,0.67 80.88,0.67 79.3,2.25 78.9,2.65 78.9,2.95 78.9,5.67 78.43,6.14 77.28,7.29
ph_V_shunt on Bottom Layer "Top Layer-No Net 1" (solid, pour order 52): 7.74,44.5 9.11,43.13 14.28,43.13 18.335,47.185 20.44,47.185 20.82,47.565 20.82,59.97 20.82,72.78 17,76.6 12.84,76.6 10.525,78.915 10.09,78.915 9.715,78.915 9.11,78.915 8.335,78.915 7.74,78.32
ph_W_shunt on Bottom Layer "Top Layer-No Net 1" (solid, pour order 51): 7.75,3.33 10.55,3.33 12.715,5.495 12.715,8.295 13.38,8.96 21.3,8.96 21.3,30.35 12.214,39.436 9.13,39.436 7.75,39.436
ph_W on Bottom Layer "Top Layer-No Net 1" (solid, pour order 35): 76.29,0.66 77.9,2.27 77.9,5.7 77.88,5.72 77.29,6.31 77.26,6.31 73.55,6.31 70.13,9.73 67.2,9.73 64.73,12.2 62.37,12.2 60.46,14.11 60.46,14.33 60.46,17.32 62.749,19.609 71.869,19.609 76.9,24.64 77.39,25.13 77.39,27.2 77.39,27.96 76.74,28.61 76.52,28.83 75.27,28.83 73.6,28.83 73.19,29.24 67.67,34.76 64.54,34.76 62.32,34.76 60.78,36.3 60.78,38.22 60.78,38.52 60.78,38.98 60.695,39.065 60.58,39.18 60.38,39.38 40.85,39.38 36.49,35.02 26.96,35.02 22.29,30.35 22.29,8.77 30.41,0.65 34.27,0.65 36.68,0.65 37.87,0.65 38.52,0.65 39.78,0.65 40.74,0.65 76.28,0.65
HV_SHUNT on Mid-Layer 1 "Top Layer-No Net 1" (solid, pour order 33): 173.7,73.13 168.125,67.555 166.45,65.88 166.45,49.38 172.04,43.79 173.21,42.62 173.21,40.06 173.21,39.17 174.01,38.37 174.24,38.14 176.89,38.14 179.02,38.14 179.63,38.75 179.73,38.85 179.73,39.9 179.73,71.89 178.49,73.13 178.18,73.13
HV_NEG on Mid-Layer 1 "Top Layer-No Net 1" (solid, pour order 46): 73.73,7.29 70.51,10.51 67.5,10.51 66.43,11.58 65.05,12.96 63.45,12.96 62.83,12.96 61.84,13.95 61.39,14.4 61.41,17.47 61.53,17.59 63.08,19.14 64.8,19.14 67.27,21.61 64.8,19.14 65.89,20.23 73.57,20.23 78.01,24.67 78.01,28.43 78.01,28.62 77.75,28.88 76.91,29.72 73.81,29.72 73.66,29.72 73.47,29.91 67.95,35.43 67.52,35.43 62.58,35.43 61.53,36.48 61.39,36.62 61.39,40.17 61.39,40.24 61.56,40.41 62.91,41.76 75.99,41.76 76.22,41.76 76.47,42.01 77.03,42.57 77.03,42.84 77.03,45.31 76.62,45.72 75.47,46.87 74.87,46.87 73.31,46.87 72.97,47.21 68.07,52.11 67.43,52.11 62.9,52.11 61.55,53.46 61.39,53.62 61.39,57.49 61.39,59.02 61.66,59.29 62.66,60.29 73.66,60.29 74.45,61.08 77.11,63.74 77.11,67.69 77.11,67.88 76.92,68.07 76.23,68.76 73.47,68.76 73.35,68.76 73.16,68.95 67.08,75.03 62.15,75.03 62.06,75.03 61.85,75.24 61.41,75.68 61.41,78.88 61.41,79.01 61.61,79.21 62.79,80.39 63.25,80.39 75.32,80.39 76.51,81.58 77.46,82.53 77.46,83.12 77.46,84.65 76.86,85.25 75.86,86.25 74.96,86.25 72.04,86.25 71.16,87.13 66.29,92 64.95,92 62.7,92 62.17,92.53 61.4,93.3 61.39,97.19 65.05,100.85 61.41,97.34 64.58,100.85 75.12,100.85 77.19,102.92 77.89,103.62 77.89,103.88 77.89,106.31 75.68,108.52 75.56,108.64 75.19,108.64 72.69,108.64 67.61,113.72 67.45,113.88 67.14,113.88 63.08,113.88 61.95,115.01 61.37,115.59 61.37,118.47 61.37,118.79 61.67,119.09 62.56,119.98 67.71,119.98 165.39,119.98 165.39,62.14 165.39,4.3 165.39,0.67 161.76,0.67 80.88,0.67 79.3,2.25 78.9,2.65 78.9,2.95 78.9,5.67 78.43,6.14 77.28,7.29
ph_V on Mid-Layer 1 "Top Layer-No Net 1" (solid, pour order 41): 76.45,40.37 78.06,41.98 78.06,45.41 78.04,45.43 77.45,46.02 77.42,46.02 73.71,46.02 70.29,49.44 67.36,49.44 64.89,51.91 62.53,51.91 60.62,53.82 60.62,54.04 60.62,57.03 62.909,59.319 62.909,60.674 65.29,63.056 75.766,63.056 77.55,64.84 77.55,66.91 77.55,67.67 76.9,68.32 76.68,68.54 75.43,68.54 73.76,68.54 73.35,68.95 67.83,74.47 64.7,74.47 62.48,74.47 60.94,76.01 60.94,77.93 60.94,78.23 60.94,79.19 60.565,79.565 60.08,79.565 58.66,79.565 35.035,79.565 32.07,76.6 25.76,76.6 21.94,72.78 21.94,51.886 24.582,49.244 34.174,49.244 35.35,49.244 37.254,49.244 37.859,48.639 38.3,48.197 38.3,42.55 40,40.85 40.49,40.36 40.9,40.36 76.44,40.36
ph_U on Mid-Layer 1 "Top Layer-No Net 1" (solid, pour order 37): 77.24,81.07 77.88,81.73 77.88,85.16 77.86,85.18 77.27,85.77 77.24,85.77 73.53,85.77 70.11,89.19 68.39,89.19 65.92,91.66 62.35,91.66 60.44,93.57 60.44,93.79 60.44,96.78 66.63,102.97 75.75,102.97 76.88,104.1 77.37,104.59 77.37,106.66 77.37,107.42 76.72,108.07 76.5,108.29 75.25,108.29 73.58,108.29 73.17,108.7 67.65,114.22 64.52,114.22 62.3,114.22 60.76,115.76 60.76,117.68 60.76,117.98 60.76,119.69 60.68,119.77 60.36,120.09 59.8,120.09 27.86,120.09 27.54,120.09 27.3,120.09 26.75,120.09 26.3,120.09 19.03,120.092 19.03,117.68 17.9,115.76 14.98,115.29 12.06,118.75 7.74,118.75 7.74,84.67 8.86,83.55 13.45,83.55 16.085,86.185 34.565,86.185 39.68,81.07 42.66,81.07 61.01,81.07
ph_V_shunt on Mid-Layer 1 "Top Layer-No Net 1" (solid, pour order 50): 7.74,44.5 9.11,43.13 14.28,43.13 18.335,47.185 20.44,47.185 20.82,47.565 20.82,59.97 20.82,72.78 17,76.6 12.84,76.6 10.525,78.915 10.09,78.915 9.715,78.915 9.11,78.915 8.335,78.915 7.74,78.32
ph_W_shunt on Mid-Layer 1 "Top Layer-No Net 1" (solid, pour order 49): 7.75,3.33 10.55,3.33 12.715,5.495 12.715,8.295 13.38,8.96 21.3,8.96 21.3,30.34 12.204,39.436 9.13,39.436 7.75,39.436
ph_W on Mid-Layer 1 "Top Layer-No Net 1" (solid, pour order 34): 76.29,0.66 77.9,2.27 77.9,5.7 77.88,5.72 77.29,6.31 77.26,6.31 73.55,6.31 70.13,9.73 67.2,9.73 64.73,12.2 62.37,12.2 60.46,14.11 60.46,14.33 60.46,17.32 62.749,19.609 71.869,19.609 76.9,24.64 77.39,25.13 77.39,27.2 77.39,27.96 76.74,28.61 76.52,28.83 75.27,28.83 73.6,28.83 73.19,29.24 67.67,34.76 64.54,34.76 62.32,34.76 60.78,36.3 60.78,38.22 60.78,38.52 60.78,38.98 60.695,39.065 60.58,39.18 60.38,39.38 40.85,39.38 36.49,35.02 26.96,35.02 22.29,30.35 22.29,8.77 30.41,0.65 34.27,0.65 36.68,0.65 37.87,0.65 38.52,0.65 39.78,0.65 40.74,0.65 76.28,0.65
HV_SHUNT on Mid-Layer 2 "Top Layer-No Net 1" (solid, pour order 33): 173.7,73.13 168.125,67.555 166.45,65.88 166.45,49.38 172.04,43.79 173.21,42.62 173.21,40.06 173.21,39.17 174.01,38.37 174.24,38.14 176.89,38.14 179.02,38.14 179.63,38.75 179.73,38.85 179.73,39.9 179.73,71.89 178.49,73.13 178.18,73.13
HV_POS on Mid-Layer 2 "Top Layer-No Net 1" (solid, pour order 29): 78.52,119.23 78.52,0.72 150.41,0.72 156.65,6.96 156.65,24.58 156.65,58.12 179.77,81.24 179.77,117.27 177.06,119.98 146.72,119.98 77.77,119.98 77.7,120.05
ph_V on Mid-Layer 2 "Top Layer-No Net 1" (solid, pour order 40): 76.45,40.37 78.06,41.98 78.06,45.41 78.04,45.43 77.45,46.02 77.42,46.02 73.71,46.02 70.29,49.44 67.36,49.44 64.89,51.91 62.53,51.91 60.62,53.82 60.62,54.04 60.62,57.03 62.909,59.319 66.646,63.056 75.766,63.056 77.55,64.84 77.55,66.91 77.55,67.67 76.9,68.32 76.68,68.54 75.43,68.54 73.76,68.54 73.35,68.95 67.83,74.47 64.7,74.47 62.48,74.47 60.94,76.01 60.94,77.93 60.94,78.23 60.94,79.19 60.565,79.565 60.08,79.565 58.66,79.565 35.035,79.565 32.07,76.6 25.76,76.6 21.94,72.78 21.94,51.886 24.582,49.244 34.174,49.244 35.35,49.244 37.254,49.244 37.859,48.639 38.3,48.197 38.3,42.55 40,40.85 40.49,40.36 40.9,40.36 76.44,40.36
ph_U on Mid-Layer 2 "Top Layer-No Net 1" (solid, pour order 36): 77.24,81.07 77.88,81.73 77.88,85.16 77.86,85.18 77.27,85.77 77.24,85.77 73.53,85.77 70.11,89.19 68.39,89.19 65.92,91.66 62.35,91.66 60.44,93.57 60.44,93.79 60.44,96.78 66.63,102.97 75.75,102.97 76.88,104.1 77.37,104.59 77.37,106.66 77.37,107.42 76.72,108.07 76.5,108.29 75.25,108.29 73.58,108.29 73.17,108.7 67.65,114.22 64.52,114.22 62.3,114.22 60.76,115.76 60.76,117.68 60.76,117.98 60.76,119.69 60.68,119.77 60.36,120.09 59.8,120.09 27.86,120.09 27.54,120.09 27.3,120.09 26.75,120.09 26.3,120.09 19.03,120.092 19.03,117.68 17.9,115.76 14.98,115.29 12.06,118.75 7.74,118.75 7.74,84.67 8.86,83.55 13.45,83.55 16.085,86.185 34.565,86.185 39.68,81.07 42.66,81.07 61.01,81.07
ph_V_shunt on Mid-Layer 2 "Top Layer-No Net 1" (solid, pour order 48): 7.74,44.5 9.11,43.13 14.28,43.13 18.335,47.185 20.44,47.185 20.82,47.565 20.82,59.97 20.82,72.78 17,76.6 12.84,76.6 10.525,78.915 10.09,78.915 9.715,78.915 9.11,78.915 8.335,78.915 7.74,78.32
ph_W_shunt on Mid-Layer 2 "Top Layer-No Net 1" (solid, pour order 47): 7.75,3.33 10.55,3.33 12.715,5.495 12.715,8.295 13.38,8.96 21.3,8.96 21.3,30.35 12.214,39.436 9.13,39.436 7.75,39.436
ph_W on Mid-Layer 2 "Top Layer-No Net 1" (solid, pour order 33): 76.29,0.66 77.9,2.27 77.9,5.7 77.88,5.72 77.29,6.31 77.26,6.31 73.55,6.31 70.13,9.73 67.2,9.73 64.73,12.2 62.37,12.2 60.46,14.11 60.46,14.33 60.46,17.32 62.749,19.609 71.869,19.609 76.9,24.64 77.39,25.13 77.39,27.2 77.39,27.96 76.74,28.61 76.52,28.83 75.27,28.83 73.6,28.83 73.19,29.24 67.67,34.76 64.54,34.76 62.32,34.76 60.78,36.3 60.78,38.22 60.78,38.52 60.78,38.98 60.695,39.065 60.58,39.18 60.38,39.38 40.85,39.38 36.49,35.02 26.96,35.02 22.29,30.35 22.29,8.77 30.41,0.65 34.27,0.65 36.68,0.65 37.87,0.65 38.52,0.65 39.78,0.65 40.74,0.65 76.28,0.65

## Keep-outs
Keep-Out Layer:
  circle w2: c15.84,4 r3
  circle w2: c15.84,40 r3
  circle w2: c15.84,80 r3
  circle w3: c50.195,20.78 r3
  circle w3: c90.422,20.78 r3
  circle w3: c90.422,60.531 r3
  circle w3: c50.195,60.531 r3
  circle w3: c90.422,100.409 r3
  circle w3: c50.195,100.409 r3
  lines w2: 12.84,117.65 ccw(c15.84,117.65) 18.84,117.65

## Silkscreen, mask and mechanical layers (free items; w line width, h text height)
Top Overlay:
  lines w0.254: 11.46,47.8 11.47,47.81
  text "QUT Motorsport" at 154.591,117.326 h3.5
  text "Inverter v3.5 - Power" at 154.718,114.532 h3.5
  text "DC_POS (+)" at 185.04,85.74 h3.2 r90
  text "Plate Temp" at 38.33,78.7 h1.52 r90
  text "HV Power" at 84.07,58.15 h1.52 r90
  text "DC_NEG (-)" at 184.44,42.29 h3.2 r90
  text "Current Sense" at 38.33,35.79 h1.52 r90
  text "DC Link Current" at 158.04,25.63 h1.52
  text "Live Bus" at 161.76,18.99 h1.52
Mechanical 1:
  the board outline again, w0.254

## Text inside footprints (layer, text, board x,y; h text height)
CS1: Top Overlay "3" at 17.37,34.82 h1.5; Top Overlay "1" at 25.18,34.98 h1.5
CS2: Top Overlay "3" at 24.647,44.757 h1.5; Top Overlay "1" at 17.535,44.757 h1.5
CS3: Top Overlay "3" at 169.07,34.61 h1.5; Top Overlay "1" at 162.19,34.68 h1.5